# Altium PCB TIDA050024.PcbDoc (part 1 of 3)
Units mil, origin at the board's own origin, x right, y up, seen from the top; angles counter-clockwise.
Board outline 5500.19 x 3301.39 mil, 4 copper layers (Top Layer, Signal Layer 1, Signal Layer 2, Bottom Layer), stack 46.8 mil thick; 150 components, 88 nets, 368 pads, 374 vias.
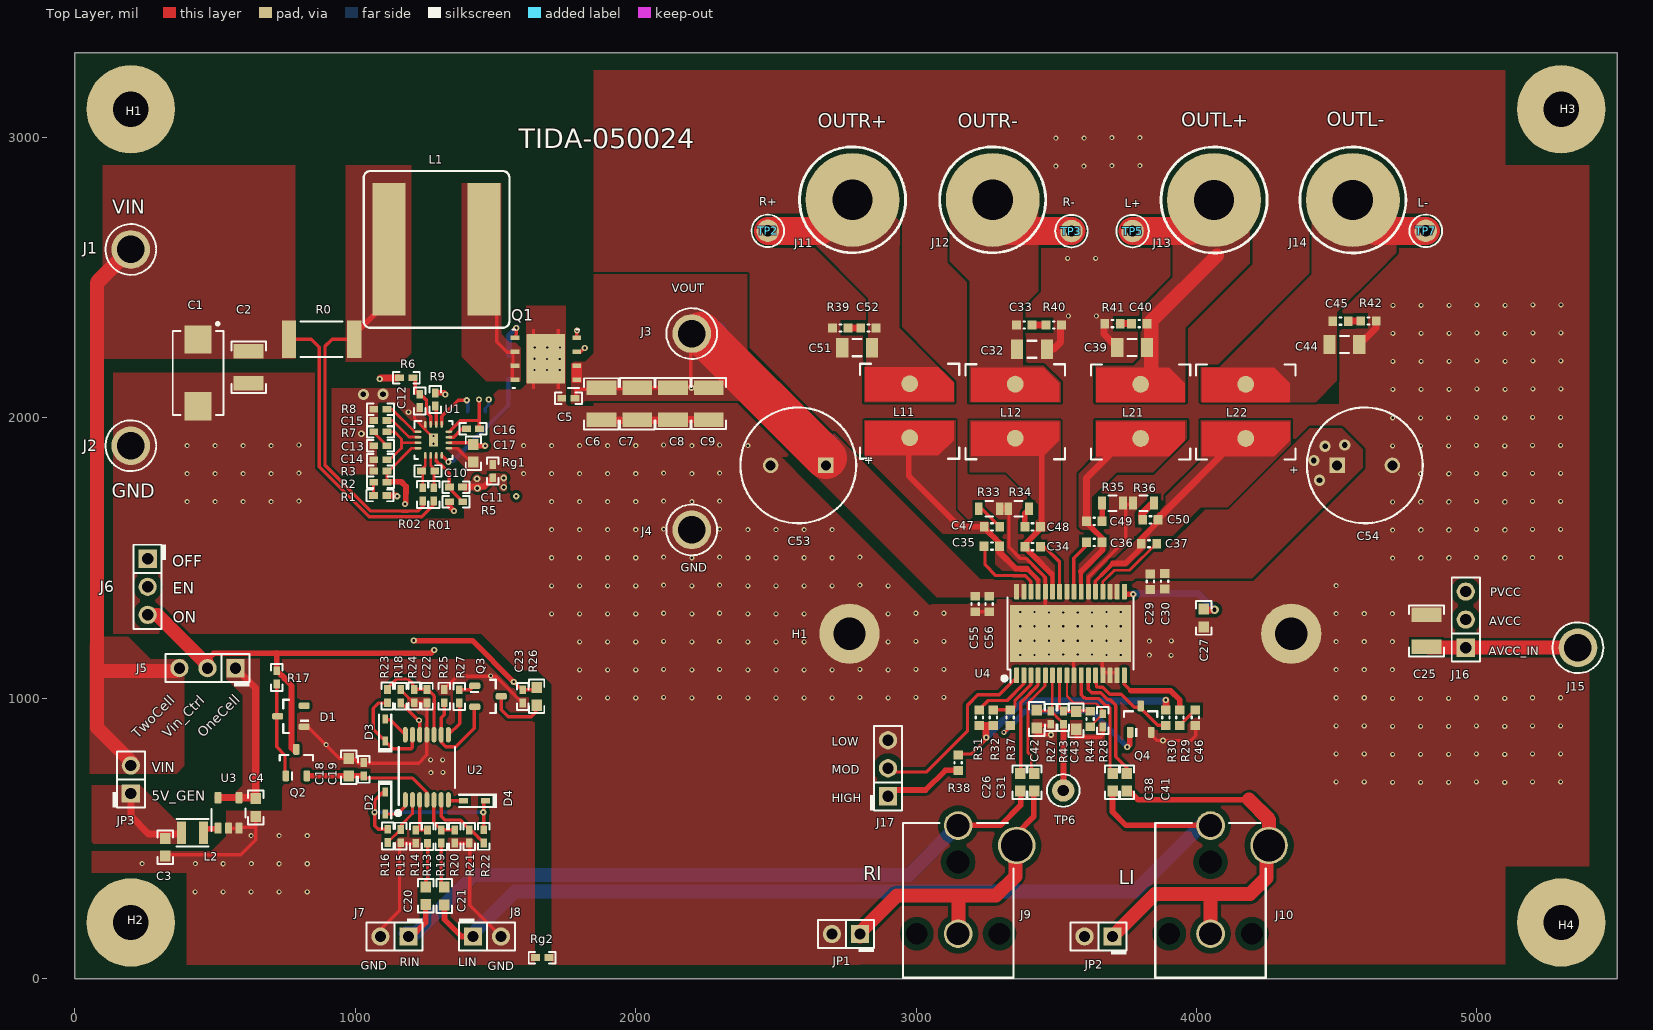
[diagram p0: Top Layer view]
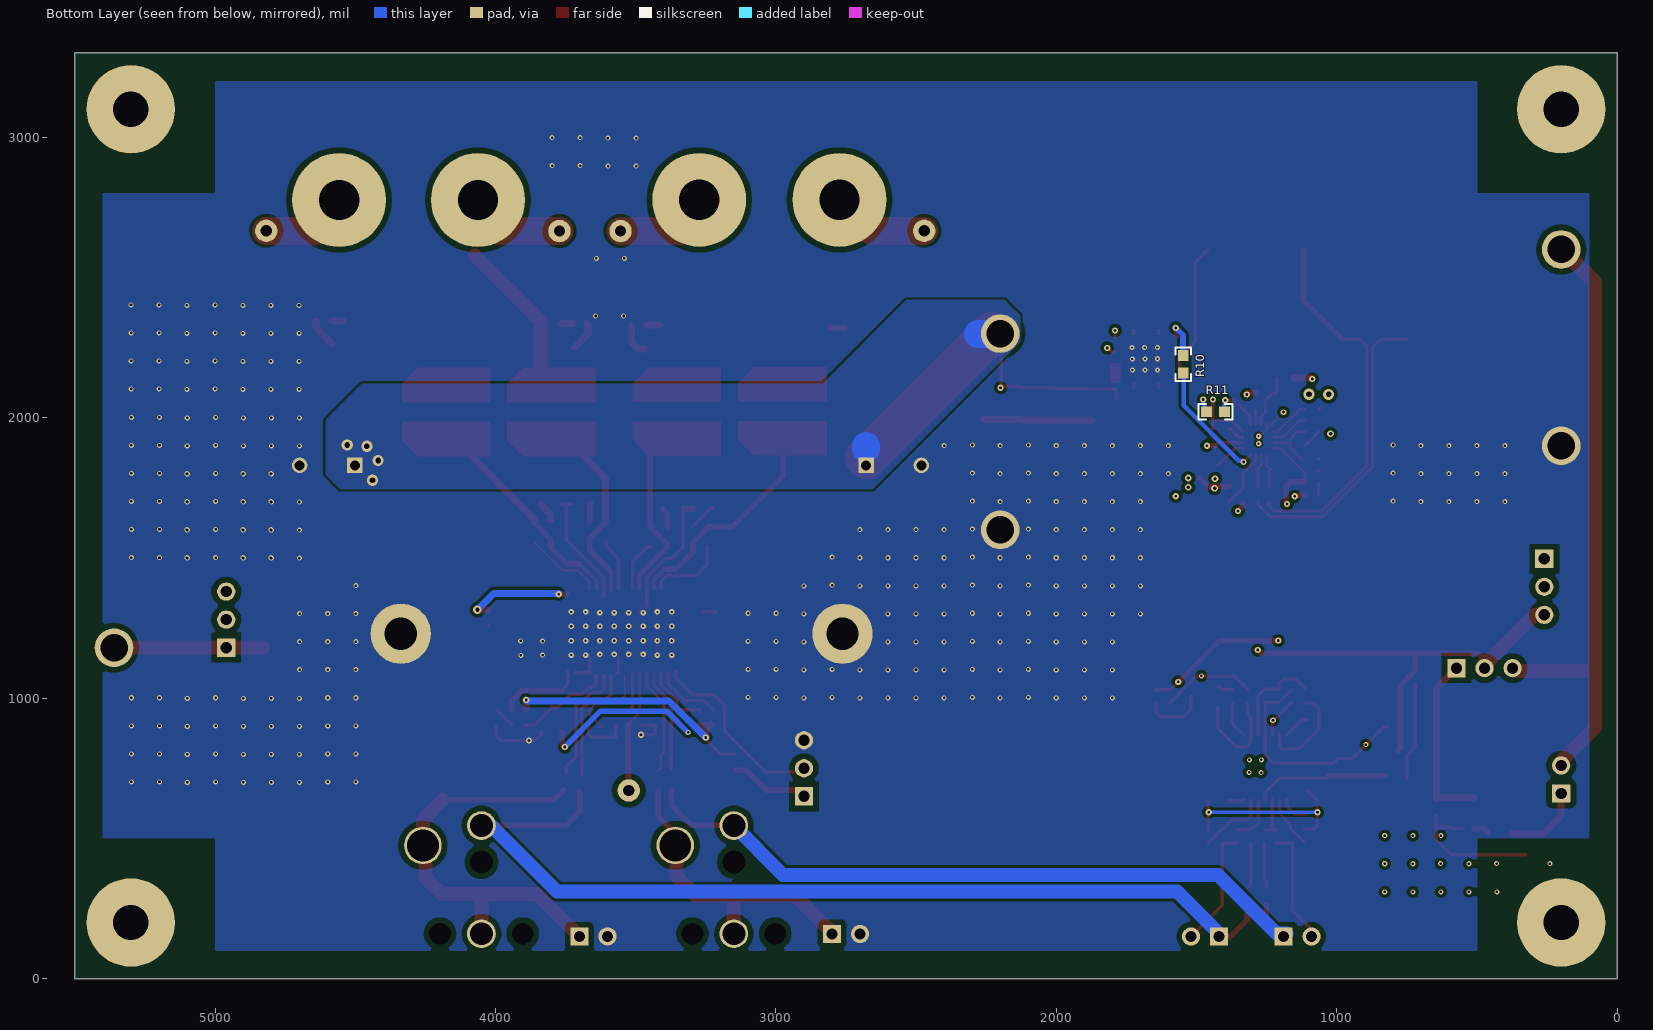
[diagram p1: Bottom Layer view, seen from below]
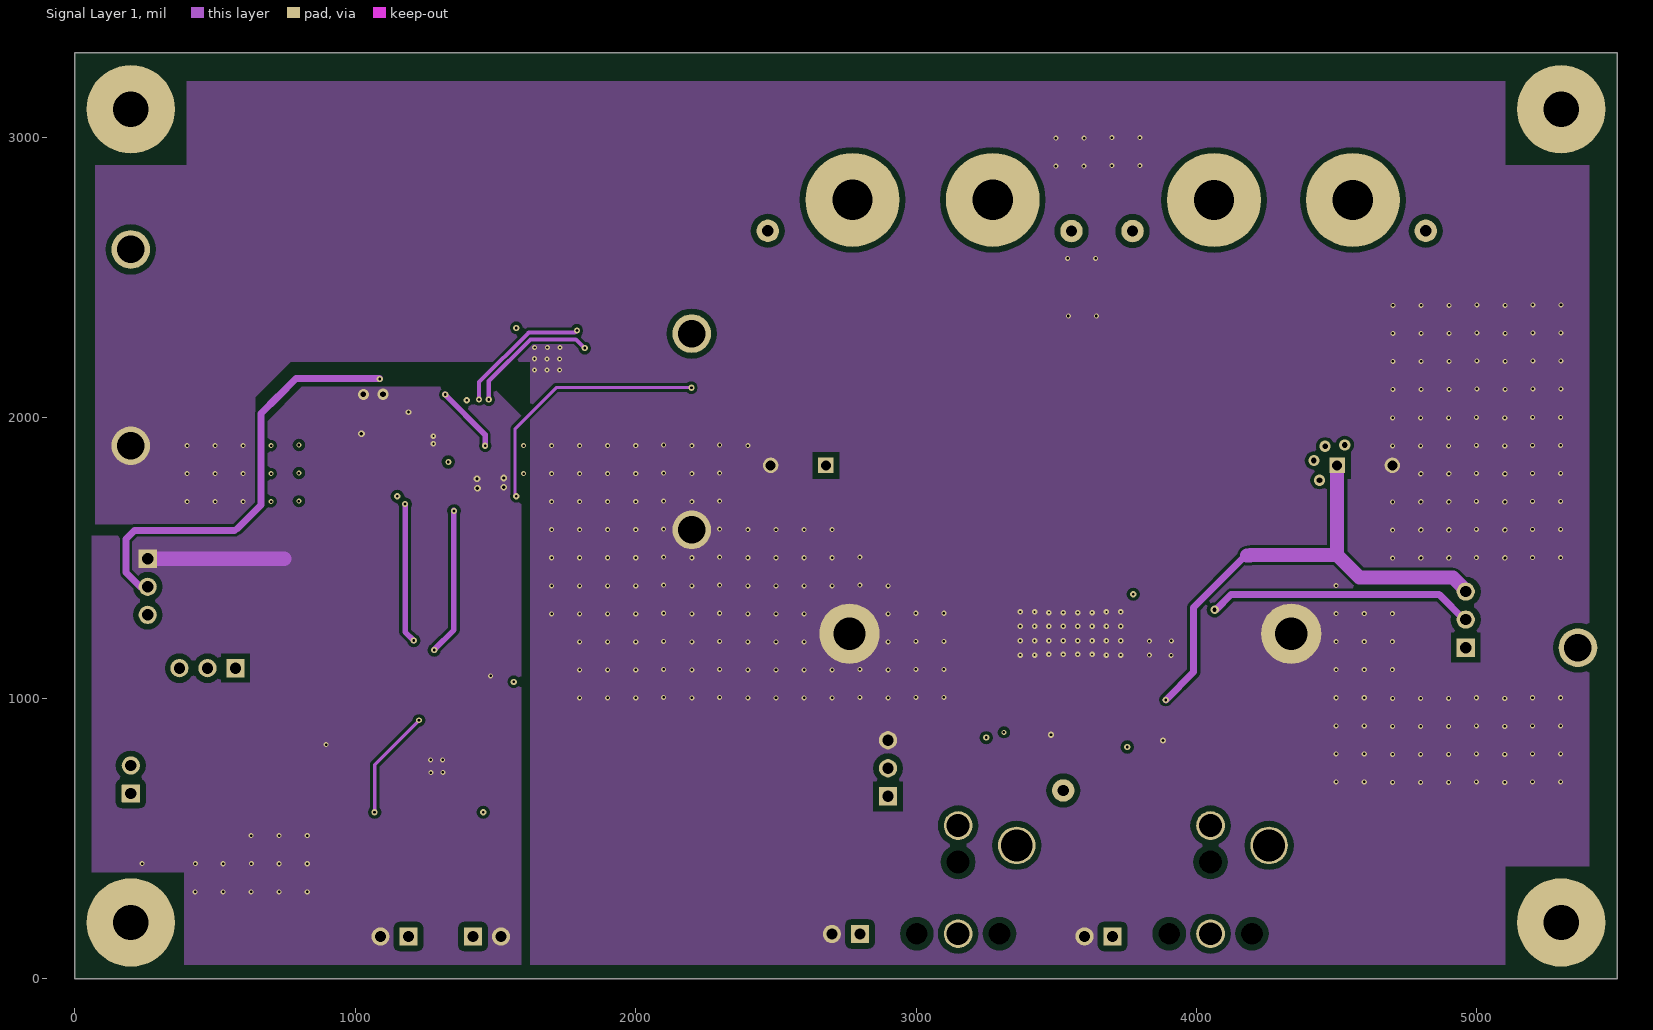
[diagram p2: Signal Layer 1]
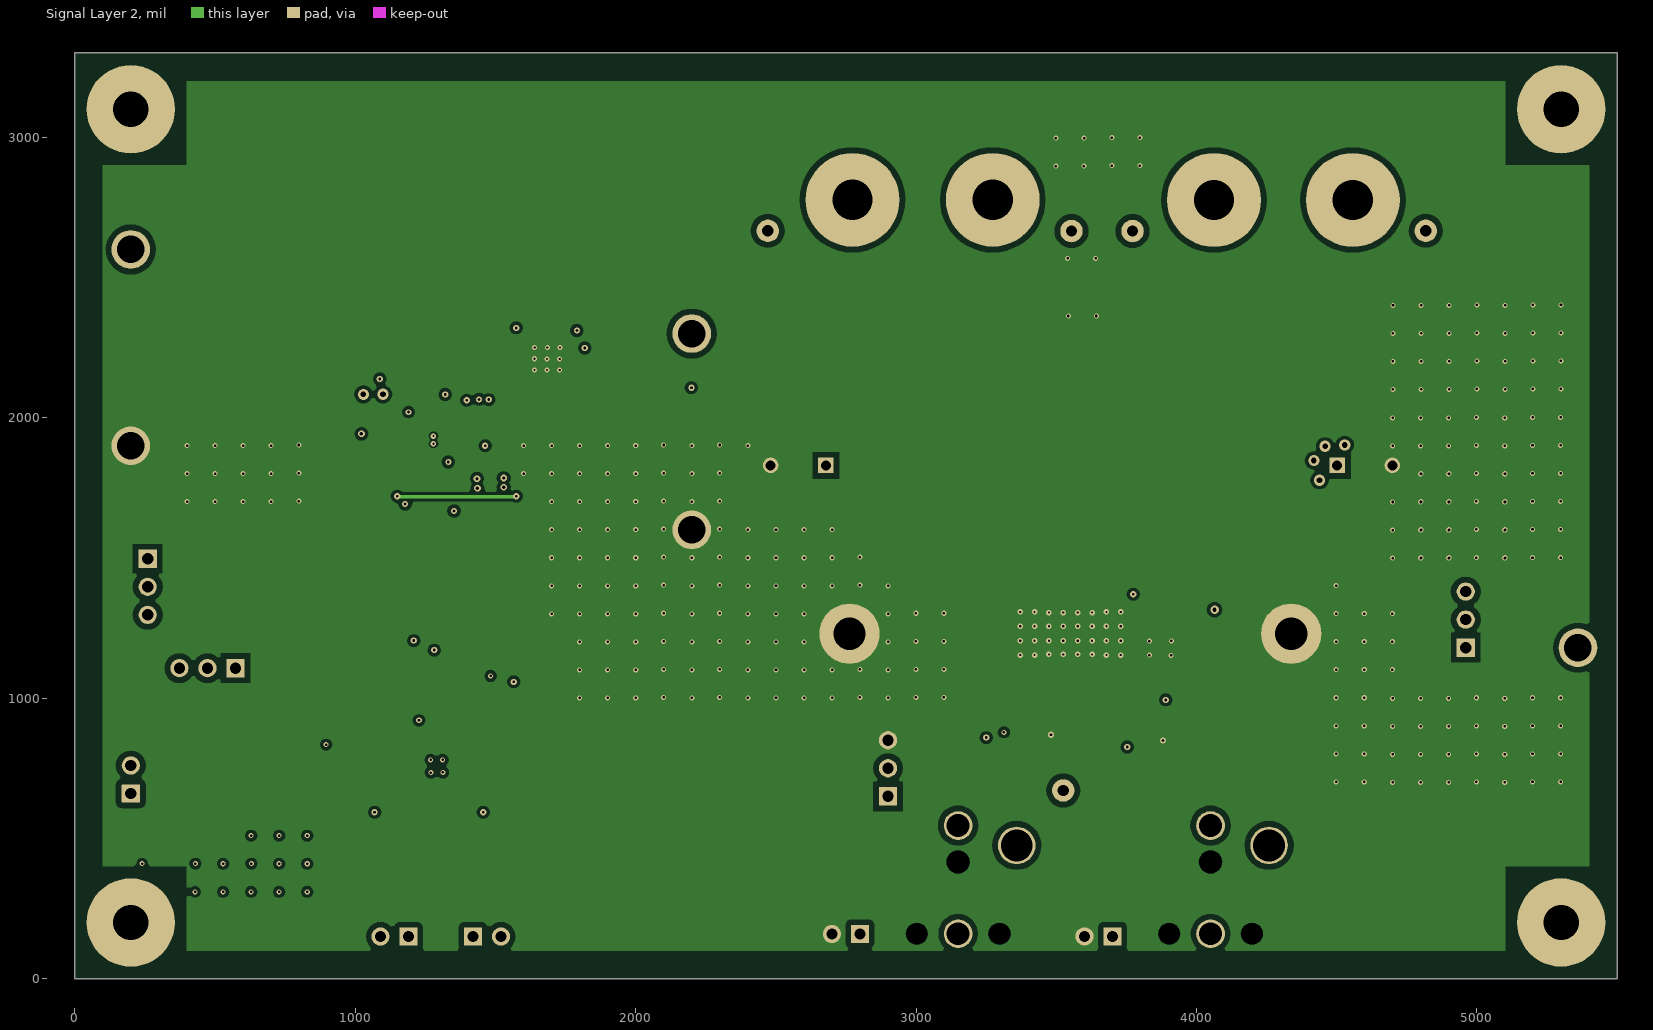
[diagram p3: Signal Layer 2]

## Layer stack, top to bottom
Top Solder: solder mask 0.4, Solder Resist, Dk 3.5
Top Layer: signal copper 2.8
Dielectric1: core 12.8, FR-4, Dk 4.2
Signal Layer 1: signal copper 1.4
Dielectric 3: core 12.8, Dk 4.2
Signal Layer 2: signal copper 1.4
Dielectric 2: core 12.8, Dk 4.2
Bottom Layer: signal copper 2.8
Bottom Solder: solder mask 0.4, Solder Resist, Dk 3.5

## Board outline
0,0 5500,0 5500.19,0.19 5500.19,3301.39 0.57,3301.39

## Design rules (kind name [scope] priority, off if disabled: settings)
AcuteAngle [All] p1: minimum=4.50000000000000E+0001 checktracksonly=FALSE
AssemblyTestPointUsage [All] p1: valid=2
Clearance "U1 Clearance" [InComponent('U1')] p1: gap=6 ignorepadtopadclearanceinfootprint=FALSE except(0: Arc-Hole Track-Hole SMDPad-Hole THPad-Hole Via-Hole Fill-Hole Poly-Hole Region-Hole Text-Hole)
Clearance "U2 Clearance" [InComponent('U2')] p2: gap=7.5 ignorepadtopadclearanceinfootprint=FALSE except(0: Arc-Hole Track-Hole SMDPad-Hole THPad-Hole Via-Hole Fill-Hole Poly-Hole Region-Hole Text-Hole; 7: Arc-Text)
Clearance "U3 Clearance" [InComponent('U3')] p3: gap=7.5 ignorepadtopadclearanceinfootprint=FALSE except(0: Arc-Hole Track-Hole SMDPad-Hole THPad-Hole Via-Hole Fill-Hole Poly-Hole Region-Hole Text-Hole; 7: Arc-Text)
Clearance Clearance_BoardEdge [OnCopper and Not InComponentClass('Logo') and not InComponentClass('FiducialMark') and not InRegion(1000,500,4000,800) vs IsKeepOut] p4: gap=15 ignorepadtopadclearanceinfootprint=FALSE except(0: Arc-Hole Track-Region Track-Hole SMDPad-Hole THPad-Hole Via-Hole Fill-Hole Poly-Hole Region-Hole Text-Hole; 10: Track-Poly Poly-Poly Poly-Region Poly-Text Region-Region Region-Text; 30: Arc-Arc Text-Text)
Clearance [All] p5: gap=8 ignorepadtopadclearanceinfootprint=FALSE except(0: Arc-Hole Track-Hole SMDPad-Hole THPad-Hole Via-Hole Fill-Hole Poly-Hole Region-Hole Text-Hole; 6: Track-Track Track-SMDPad SMDPad-SMDPad SMDPad-THPad; 10: Track-Poly SMDPad-Poly; 12: Via-Poly; 20: THPad-Poly)
ComponentClearance ComponentClearance_MountingHoles_FiducialMarks [InComponentClass('Mounting Holes') vs InComponentClass('FiducialMark')] p1: gap=20 collisioncheckmode=3 verticalgap=10 showdistances=FALSE
ComponentClearance ComponentClearance_SHUNT [InComponentClass('Shunt')] p2: gap=0 collisioncheckmode=3 verticalgap=0 showdistances=FALSE
ComponentClearance ComponentClearance_Logo [All] p3: gap=10 collisioncheckmode=3 verticalgap=10 showdistances=FALSE
ComponentClearance ComponentClearance_ScrewToNut [(HasFootprint('NY PMS 440 0025 PH')) vs (HasFootprint('Keystone_1902C'))] p4: gap=5 collisioncheckmode=3 verticalgap=10 showdistances=FALSE
ComponentClearance ComponentClearance_MountingHoles [InComponentClass('Mounting Holes')] p5: gap=250 collisioncheckmode=3 verticalgap=100000 showdistances=FALSE
ComponentClearance ComponentClearance_SmallPassives [HasFootprint('0201*') or HasFootprint('0402*') or HasFootprint('0508') or HasFootprint('0603*') or HasFootprint('0612') or HasFootprint('0805*') or HasFootprint('0815*') or HasFootprint('0830*') or HasFootprint('1206*') or HasFootprint('1210*') or HasFootprint('1808*') or HasFootprint('1812*') or HasFootprint('1825*') or HasFootprint('2010*') or HasFootprint('2220*') or HasFootprint('2225*') or HasFootprint('2512*') or HasFootprint('2728*') or HasFootprint('3518*') vs HasFootprint('0201*') or HasFootprint('0402*') or HasFootprint('0508') or HasFootprint('0603*') or HasFootprint('0612') or HasFootprint('0805*') or HasFootprint('0815*') or HasFootprint('0830*') or HasFootprint('1206*') or HasFootprint('1210*') or HasFootprint('1808*') or HasFootprint('1812*') or HasFootprint('1825*') or HasFootprint('2010*') or HasFootprint('2220*') or HasFootprint('2225*') or HasFootprint('2512*') or HasFootprint('2728*') or HasFootprint('3518*')] p6: gap=20 collisioncheckmode=3 verticalgap=10 showdistances=FALSE
ComponentClearance ComponentClearance_THtoSMT [IsThruComponent vs IsSMTComponent] p7 off: gap=10 collisioncheckmode=3 verticalgap=100000 showdistances=FALSE
ComponentClearance ComponentClearance_THtoTH [IsThruComponent vs IsThruComponent] p8: gap=10.11 collisioncheckmode=3 verticalgap=100000 showdistances=FALSE
ComponentClearance [All] p9: gap=10 collisioncheckmode=3 verticalgap=10 showdistances=FALSE
DiffPairsRouting [All] p1: maxlimit=100 minlimit=10 mostfreqgap=10 toplayer_minwidth=15 toplayer_maxwidth=15 toplayer_prefwidth=15 midlayer1_minwidth=15 midlayer1_maxwidth=15 midlayer1_prefwidth=15 midlayer2_minwidth=15 midlayer2_maxwidth=15 midlayer2_prefwidth=15 bottomlayer_minwidth=15 bottomlayer_maxwidth=15 bottomlayer_prefwidth=15 maxuncoupledlength=1000
FabricationTestPointUsage TestPointUsage [All] p1: valid=2 allowmultiple=FALSE
FabricationTestpoint Testpoint [All] p1: side=3 testpointundercomponent=TRUE minsize=40 maxsize=100 preferedsize=60 minholesize=0 maxholesize=40 preferedholesize=32 testpointgrid=1 allowsidetop=TRUE allowsidebottom=TRUE usegrid=TRUE gridtolerance=0.01
FanoutControl Fanout_LCC [IsLCC] p1: bgadir=Out bgaviamode=Centered fanoutstyle=Auto fanoutdirection=Alternating viagrid=1 // Fanout_LCC (Default Rule)
FanoutControl Fanout_BGA [IsBGA] p2: bgadir=Out bgaviamode=Centered fanoutstyle=Auto fanoutdirection=Alternating viagrid=1 // Fanout_BGA (Default Rule)
FanoutControl Fanout_Default [All] p4: bgadir=Out bgaviamode=Centered fanoutstyle=Auto fanoutdirection=Alternating viagrid=1 // Fanout_Default (Default Rule)
FanoutControl Fanout_Small [(CompPinCount < 5)] p5: bgadir=Out bgaviamode=Centered fanoutstyle=Auto fanoutdirection=OutThenIn viagrid=1 // Fanout_Small (Default Rule)
HoleSize [All] p1: absolutevalues=TRUE maxlimit=100 minlimit=8 maxpercent=80.000 minpercent=20.000
HoleToHoleClearance [All] p1: gap=1 allowstackedmicrovias=TRUE
MinimumAnnularRing MinimumAnnularRing_small [TouchesRoom('BGA_Room')] p1: minimumring=2.8
MinimumAnnularRing MinimumAnnularRing_ThermalPadVias [IsVia and InAnyComponent] p2: minimumring=5.91
MinimumAnnularRing [All] p3: minimumring=5
MinimumSolderMaskSliver MinimumSolderMaskSliver_Logo [InComponentClass('Logo') vs InComponentClass('Logo')] p1: minsoldermaskwidth=0.7
MinimumSolderMaskSliver [All] p2: minsoldermaskwidth=3
PlaneClearance [All] p1: clearance=10
PlaneConnect [All] p1: planeconnectstyle=Direct reliefexpansion=10 reliefentries=4 reliefconductorwidth=10 reliefairgap=10
PolygonConnect PolygonConnect-TH-Relief [IsPoly vs (IsThruPin)  And Not (InComponent('U3'))  And Not (InComponent('U4'))] p1: connectstyle=Direct reliefconductorwidth=20 reliefentries=4 polygonreliefangle="90 Angle" airgapwidth=10
PolygonConnect PolygonConnect-DirectConn [All] p2: connectstyle=Direct reliefconductorwidth=10 reliefentries=4 polygonreliefangle="90 Angle" airgapwidth=10
PolygonConnect [All] p3: connectstyle=Relief reliefconductorwidth=10 reliefentries=4 polygonreliefangle="90 Angle" airgapwidth=10
RoutingVias ThermalPadVias [IsVia and InAnyComponent] p1: holewidth=7.87 width=19.68 viastyle="Through Hole" minholewidth=7.87 minwidth=19.68 maxholewidth=12.99 maxwidth=23.62
RoutingVias [All] p2: holewidth=10 width=22 viastyle="Through Hole" minholewidth=4 minwidth=10 maxholewidth=100 maxwidth=100
SMDToCorner [All] p1: distance=0
SilkToBoardRegionClearance [Not ((IsComment or IsDesignator) And (Hide <> 'False')) and not InRegion(1000,500,4000,800)] p1:
SilkToSilkClearance SilkToSilkClearance_Pb-FreeLogo [(HasFootprint('Pb-Free_Overlay_Medium') OR HasFootprint('Pb-Free_Overlay_Small')) vs (HasFootprint('Pb-Free_Overlay_Medium') OR HasFootprint('Pb-Free_Overlay_Small'))] p1: silktosilkclearance=0
SilkToSilkClearance [All] p2: silktosilkclearance=3
SilkToSolderMaskClearance SilkToComonentPadClearance [IsPad and InAnycomponent] p1 off: minsilkscreentomaskgap=5 clearancetoexposedcopper=TRUE
SilkToSolderMaskClearance "Silk to Solder Mask Opening" [All] p2 off: minsilkscreentomaskgap=4 clearancetoexposedcopper=TRUE
SolderMaskExpansion [All] p1: expansion=1 istentingtop=FALSE
Width [All] p1: maxlimit=100 minlimit=6 preferedwidth=10 checkconnectedcopper=TRUE
13 further rules are at their usual default settings.

## Classes and differential pairs
component class "Mounting Holes": H1 H2 H3 H4
component class TIDA050024_Hardware: H1 H2 H3 H4
component class TIDA050024_1: C1 C2 C3 C4 C5 C6 C7 C8 C9 C10 C11 C12 C13 C14 C15 C16 C17 C18 C19 C20 C21 C22 C23 D1 D2 D3 D4 J1 J2 J3 J4 J5 J6 J7 J8 JP3 L1 L2 Q1 Q2 Q3 R0 R01 R1 R2 R02 R3 R5 R6 R7 R8 R9 R10 R11 R12 R13 R14 R15 R16 R17 R18 R19 R20 R21 R22 R23 R24 R25 R26 R27 Rg1 Rg2 U1 U2 U3
component class Header: J5 J6 J7 J8 J16 J17 JP1 JP2 JP3
component class "Full Flood": C29 C30 C34 C35 C36 C37 C55 C56 R33 R34 R35 R36
component class "LC Caps": C32 C39 C44 C51
component class TIDA050024_2: C25 C26 C27 C29 C30 C31 C32 C33 C34 C35 C36 C37 C38 C39 C40 C41 C42 C43 C44 C45 C46 C47 C48 C49 C50 C51 C52 C53 C54 C55 C56 H1 J10 J11 J12 J13 J14 J15 J16 J17 JP1 JP2 L11 L12 L21 L22 Q4 R27 R28 R29 R30 R31 R32 R33 R34 R35 R36 R37 R38 R39 R40 R41 R42 R43 R44 TP2 TP3 TP5 TP6 TP7 U4

## Components (designator, comment, footprint, x,y, rotation, side; value= is the part's Value field where it differs from the comment)
C1 "T495D476M025ATE120" 7343-31 440,2160 r270 top value=47uF
C2 "GRM32ER61E226KE15L" 1210_270 620,2180 r270 top value=22uF
C3 "GRM188R61E106MA73D" 0603 322.91,468.45 r270 top value=10uF
C4 "GRM188R61E106MA73D" 0603 645,610 r270 top value=10uF
C5 "C1005X5R1E105K050BC" 0402 1760,2070 r180 top value=1uF
C6 "GRM32ER61E226KE15L" 1210_270 1877.87,2049.47 r270 top value=22uF
C7 "GRM32ER61E226KE15L" 1210_270 2005.85,2049.96 r270 top value=22uF
C8 "GRM32ER61E226KE15L" 1210_270 2133.02,2050.19 r270 top value=22uF
C9 "GRM32ER61E226KE15L" 1210_270 2260.76,2050.18 r270 top value=22uF
C10 "GRM1555C1H101JA01D" 0402 1260,1810 r0 top value=100pF
C11 "CGA2B3X7R1H104K050BB" 0402 1359.34,1752.85 r0 top value=0.1uF
C12 "CGA2B3X7R1H104K050BB" 0402 1230,2060 r270 top value=0.1uF
C13 "GCM155R71E223KA55D" 0402 1090,1900 r180 top value=0.022uF
C14 "GRM1555C1H101JA01D" 0402 1090,1850 r180 top value=100pF
C15 "CGA2B3X7R1H104K050BB" 0402 1090,1990 r180 top value=0.1uF
C16 "CGA2B3X7R1H104K050BB" 0402 1420,1960 r180 top value=0.1uF
C17 "GRM188R61E106MA73D" 0603 1421.37,1873.58 r270 top value=10uF
C18 "GRM188R61E106MA73D" 0603 976.99,754.04 r90 top value=10uF
C19 "CGA2B3X7R1H104K050BB" 0402 1031,746.41 r90 top value=0.1uF
C20 "GRM188R61E106MA73D" 0603 1251.93,295.02 r90 top value=10uF
C21 "GRM188R61E106MA73D" 0603 1317.29,294.67 r90 top value=10uF
C22 "C1005X5R1E105K050BC" 0402 1256.12,1006.77 r270 top value=1uF
C23 "GRM1555C1H101JA01D" 0402 1596.87,1006.26 r270 top value=100pF
C25 "GRM32ER61E226KE15L" 1210_270 4820,1240 r90 top value=22uF
C26 "GRM188R61E105KA12D" 0603 3370.57,700.57 r90 top value=1uF
C27 "GRM188R61E105KA12D" 0603 4025.43,1286.03 r270 top value=1uF
C29 "GCM188R71H104KA57D" 0603L 3835.57,1415.57 r90 top value=0.1uF
C30 "GRM1885C1H102JA01D" 0603L 3886.18,1416.92 r90 top value=1000pF
C31 "GRM188R61E105KA12D" 0603 3420.57,700.57 r90 top value=1uF
C32 "GRM31MR71H684KA88L" 1206L 3413.43,2244.29 r0 top value=0.68uF
C33 "GRM188R71H103KA01D" 0603L 3385.57,2330.57 r0 top value=0.01uF
C34 "GCM188R71H104KA57D" 0603L 3415.57,1540.57 r0 top value=0.1uF
C35 "GCM188R71H104KA57D" 0603L 3270.23,1542.04 r180 top value=0.1uF
C36 "GCM188R71H104KA57D" 0603L 3635.57,1555.57 r180 top value=0.1uF
C37 "GCM188R71H104KA57D" 0603L 3830.57,1550.57 r0 top value=0.1uF
C38 "GRM188R61E105KA12D" 0603 3700.57,700.57 r90 top value=1uF
C39 "GRM31MR71H684KA88L" 1206L 3770.57,2250.57 r180 top value=0.68uF
C40 "GRM188R71H103KA01D" 0603L 3795.57,2335.57 r180 top value=0.01uF
C41 "GRM188R61E105KA12D" 0603 3750.57,700.57 r90 top value=1uF
C42 "GRM188R61E105KA12D" 0603 3430.57,925.57 r90 top value=1uF
C43 "GRM188R61E105KA12D" 0603 3570.57,920.57 r90 top value=1uF
C44 "GRM31MR71H684KA88L" 1206L 4527.15,2260.95 r0 top value=0.68uF
C45 "GRM188R71H103KA01D" 0603L 4513.48,2344.34 r0 top value=0.01uF
C46 "GRM1885C1H470JA01D" 0603L 3995.57,930.57 r270 top value=47pF
C47 "GRM1885C1H331JA01D" 0603L 3270.57,1610.57 r180 top value=330pF
C48 "GRM1885C1H331JA01D" 0603L 3415.57,1610.57 r0 top value=330pF
C49 "GRM1885C1H331JA01D" 0603L 3635.57,1630.57 r180 top value=330pF
C50 "GRM1885C1H331JA01D" 0603L 3835.57,1635.57 r0 top value=330pF
C51 "GRM31MR71H684KA88L" 1206L 2790,2250 r180 top value=0.68uF
C52 "GRM188R71H103KA01D" 0603L 2830,2320 r180 top value=0.01uF
C53 "EEU-FC1V221" FC_1000x1250 2580,1830 r180 top value=220uF
C54 "EEU-FC1V221" FC_1000x1250 4600,1830 r0 top value=220uF
C55 "GCM188R71H104KA57D" 0603L 3210.57,1335.57 r90 top value=0.1uF
C56 "GRM1885C1H102JA01D" 0603L 3260.57,1335.57 r90 top value=1000pF
D1 "BZX84C4V3LT1G" SOT-23 770.87,935.34 r180 top value=4.3V
D2 "1N4148WT" Fairchild_SOD-523F 1106.87,626.26 r270 top value=75V
D3 "1N4148WT" Fairchild_SOD-523F 1106.87,886.26 r90 top value=75V
D4 "1N4148WT" Fairchild_SOD-523F 1425.49,633.82 r180 top value=75V
H1 "NY PMS 440 0025 PH" "NY PMS 440 0025 PH" 200,3100 r90 top
H1 "ATS-TI10P-521-C1-R1" HSINK_ATS-TI10P-521-C1-R1 3550,1230 r180 top
H2 "NY PMS 440 0025 PH" "NY PMS 440 0025 PH" 200,200 r90 top
H3 "NY PMS 440 0025 PH" "NY PMS 440 0025 PH" 5300,3100 r90 top
H4 "NY PMS 440 0025 PH" "NY PMS 440 0025 PH" 5300,200 r90 top
J1 "1502-2" Keystone1502-2 200,2600 r0 top
J2 "1502-2" Keystone1502-2 200,1900 r0 top
J3 "1502-2" Keystone1502-2 2200,2300 r0 top
J4 "1502-2" Keystone1502-2 2200,1600 r0 top
J5 "TSW-103-07-G-S" TSW-103-07-G-S 473.18,1106.94 r180 top
J6 "TSW-103-07-G-S" TSW-103-07-G-S 260.09,1397.08 r270 top
J7 "TSW-102-07-G-S" TSW-102-07-G-S 1140,150 r180 top
J8 "TSW-102-07-G-S" TSW-102-07-G-S 1470,150 r0 top
J9 "RIN" Keystone_971 3150,160 r90 top
J10 "LIN" Keystone_970 4050,160 r90 top
J11 "ROUT+" Keystone_7006 2773.39,2776.89 r0 top
J12 "ROUT-" Keystone_7007 3273.39,2776.89 r0 top
J13 "LOUT+" Keystone_7006 4062.44,2776.3 r0 top
J14 "LOUT-" Keystone_7007 4557.44,2776.3 r0 top
J15 "Suggest using a net name here" Keystone1502-2 5360,1180 r0 top value=Double
J16 "AVCC-SEL" PBC03SAAN 4960,1280 r90 top
J17 "TSW-103-07-G-S" TSW-103-07-G-S 2900,750 r90 top
JP1 "TSW-102-07-G-S" TSW-102-07-G-S 2749.79,159.14 r180 top
JP2 "TSW-102-07-G-S" TSW-102-07-G-S 3650.57,150.57 r180 top
JP3 "TSW-102-07-G-S" TSW-102-07-G-S 200,710 r90 top
L1 "XAL1350-302MEB" XAL1350 1290,2600 r0 top value=3uH
L2 "DFE252012F-2R2M=P2" DFE252012C 420,520 r0 top value=2.2uH
L11 "SRT8045-103MEB" SRT8045 2977.09,2022.82 r90 top value=10uH
L12 "SRT8045-103MEB" SRT8045 3353.47,2021.36 r90 top value=10uH
L21 "SRT8045-103MEB" SRT8045 3800.57,2020.57 r90 top value=10uH
L22 "SRT8045-103MEB" SRT8045 4175.57,2020.57 r90 top value=10uH
Q1 "CSD87351Q5D" DQY0008A 1680,2210 r180 top value=30V
Q2 "BC850CLT1G" SOT-23 790,770 r90 top value="45 V"
Q3 "BSS138" SOT-23 1473.54,1006.62 r0 top value=50V
Q4 "BC850CLT1G" SOT-23 3800.57,925.57 r90 top value="45 V"
R0 "CSNL2512FT2L00" 2512 880,2280 r0 top value=0.002
R01 "CRCW040210R0FKED" 0402 1280.56,1726.59 r270 top value=10.0
R1 "CRCW040249R9FKED" 0402 1089.01,1722.61 r0 top value=49.9
R02 "CRCW040210R0FKED" 0402 1240.56,1726.59 r270 top value=10.0
R2 "ERJ-2RKF2003X" 0402 1090,1770 r180 top value=200k
R3 "CRCW040256K2FKED" 0402 1090,1810 r0 top value=56.2k
R5 "CRCW040210R0FKED" 0402 1360,1700 r180 top value=10.0
R6 "CRCW040210R0FKED" 0402 1182.18,2142.81 r180 top value=10.0
R7 "CRCW04027K50FKED" 0402 1090,1950 r0 top value=7.50k
R8 "CRCW0402137KFKED" 0402 1090,2030 r0 top value=137k
R9 "CRCW0402100KFKED" 0402 1285,2065 r270 top value=100k
R10 "RCS06030000Z0EA" 0603 1547.78,2190.77 r90 bottom value=0
R11 "RCS06030000Z0EA" 0603 1432.37,2021.02 r0 bottom value=0
R13 "CRCW04020000Z0ED" 0402 1257.9,506.32 r270 top value=0
R14 "CRCW0402100KDHEDP" 0402 1215.81,506.32 r90 top value=100k
R15 "CRCW040210K2FKED" 0402 1162.1,507.78 r90 top value=10.2k
R16 "CRCW040210K2FKED" 0402 1115.71,508.72 r90 top value=10.2k
R17 "CRCW04023K01FKED" 0402 720.03,1074.02 r90 top value=3.01k
R18 "CRCW0402100KDHEDP" 0402 1162.44,1006.77 r270 top value=100k
R19 "CRCW04020000Z0ED" 0402 1306.42,506.7 r270 top value=0
R20 "CRCW0402100KDHEDP" 0402 1355.33,506.82 r90 top value=100k
R21 "CRCW040210K2FKED" 0402 1407.1,506.82 r90 top value=10.2k
R22 "CRCW040210K2FKED" 0402 1459.04,507.43 r90 top value=10.2k
R23 "CRCW040212R1FKED" 0402 1115.13,1007.4 r90 top value=12.1
R24 "ERJ-2RKF1004X" 0402 1210.39,1007.09 r90 top value=1.00Meg
R25 "CRCW040218K7FKED" 0402 1317.3,1006.97 r270 top value=18.7k
R26 "CRCW060310K5FKEA" 0603 1646.87,1006.26 r90 top value=10.5k
R27 "CRCW04020000Z0ED" 0402 1371.04,1006.51 r270 top value=0
R27 "CRCW040220K5FKED" 0402 3480.57,930.57 r90 top value=20.5k
R28 "CRCW040239K0JNED" 0402 3665.57,920.57 r90 top value=39k
R29 "RG1608P-472-B-T5" 0603L 3940.57,930.57 r90 top value=4.70k
R30 "RC0603FR-07100KL" 0603L 3890.57,930.57 r270 top value=100k
R31 "RC0603FR-07499KL" 0603L 3225.57,930.57 r270 top value=499k
R32 "RC0603FR-07100KL" 0603L 3275.57,930.57 r90 top value=100k
R33 "CRCW080510R0JNEA" 0805_KTR 3260.57,1675.57 r180 top value=10
R34 "CRCW080510R0JNEA" 0805_KTR 3365.57,1675.57 r0 top value=10
R35 "CRCW080510R0JNEA" 0805_KTR 3700.57,1695.57 r180 top value=10
R36 "CRCW080510R0JNEA" 0805_KTR 3810.57,1695.57 r0 top value=10
R37 "RC0603FR-07100KL" 0603L 3335.57,930.57 r270 top value=100k
R38 "RC0603FR-07100KL" 0603L 3150,770 r90 top value=100k
R39 "CRCW06033R30JNEA" 0603L 2730,2320 r0 top value=3.3
R40 "CRCW06033R30JNEA" 0603L 3490.57,2330.57 r180 top value=3.3
R41 "CRCW06033R30JNEA" 0603L 3700.57,2335.57 r0 top value=3.3
R42 "CRCW06033R30JNEA" 0603L 4613.14,2344.93 r180 top value=3.3
R43 "ERJ-2GE0R00X" 0402 3525.57,930.57 r90 top value=0
R44 "RC0603FR-07100KL" 0603L 3620.57,925.57 r270 top value=100k
Rg1 "CRCW04020000Z0ED" 0402 1490.91,1809.42 r90 top value=0
Rg2 "CRCW04020000Z0ED" 0402 1666.88,75.17 r0 top value=0
TP2 "R+" Keystone5003 2471.45,2666.3 r0 top value=Orange
TP3 "R-" Keystone5003 3554.07,2665.65 r0 top value=Orange
TP5 "L+" Keystone5003 3771.82,2665.65 r0 top value=Orange
TP6 "PLIMIT" Keystone5003 3524.6,670.85 r0 top value=Orange
TP7 "L-" Keystone5003 4817.44,2666.3 r0 top value=Orange
U1 "TPS43061RTER" RTE0016E 1279.16,1920.84 r0 top
U2 "OPA4377AIPW" PW0014A_N 1255.49,753.47 r90 top
U3 "TPS613222ADBVR" DBV0005A_N 548.26,590.78 r90 top
U4 "TPA3128D2DAPR" DAP0032A_N 3550.57,1230.57 r90 top

## Footprints (in the part's own frame and the unit in brackets; to place one, negate y for a bottom-side part, rotate by r counter-clockwise, add the part's x,y. Pads: shape width x height; smd on the part's side, far side on the other; paste and mask are expansions set on the pad)
0402 [mm] "0402 from SM-752 data"
  rect 0.8x0.6 smd: 1(-0.6,0) 2(0.6,0)
  silkscreen extent -1.22,-0.52 1.22,0.52, body extent -0.55,-0.3 0.55,0.3, height 0.6
0603 [mm] "0603 from SM-752 data"
  rect 1x0.95 smd: 1(-0.8,0) 2(0.8,0)
  silkscreen extent -1.52,-0.69 1.52,0.69, body extent -0.87,-0.47 0.87,0.47, height 1
0603L [mm] "0603 from SM-752 data"
  rect 0.8x0.85 smd: 1(-0.7,0) 2(0.7,0)
  silkscreen extent -0.07,-0.33 0.07,0.33, body extent -0.87,-0.47 0.87,0.47, height 1
0805_KTR [mm] "ROHM"
  rect 0.7x1.15 smd: 1(-0.95,0) 2(0.95,0)
  silkscreen extent -0.35,-0.7 0.35,0.7, body extent -1.05,-0.67 1.05,0.67, height 0.65
1206L [mm] "1206 from SM-752 data"
  rect 1.1x1.75 smd: 1(-1.35,0) 2(1.35,0)
  silkscreen extent -0.4,-0.77 0.4,0.77, body extent -1.7,-0.9 1.7,0.9, height 1.35
1210_270 [mm] "1210"
  rect 1.3x2.7 smd: 1(-1.45,0) 2(1.45,0)
  silkscreen extent -2.32,-1.57 2.32,1.57, body extent -1.7,-1.35 1.7,1.35, height 2.7
2512 [mm] "Chip Resistor, Body 6.3x3.2mm, IPC Medium Density"
  rect 1.3x3.4 smd: 1(-2.95,0) 2(2.95,0)
  silkscreen extent -1.9,-1.6 1.9,1.6, body extent -3.22,-1.67 3.22,1.67, height 0.71
7343-31 [mm] "Medium Density based on Kemet T495 dimensions"
  rect 2.55x2.45 smd: 1(-3.025,0) 2(3.025,0)
  silkscreen extent -4.56,-2.3 3.8,2.3, body extent -3.8,-2.3 3.8,2.3, height 3.1
DAP0032A_N [mm]
  rrect22% 1.4x0.45 smd: 1(-3.8,4.875) 2(-3.8,4.225) 3(-3.8,3.575) 4(-3.8,2.925) 5(-3.8,2.275) 6(-3.8,1.625) 7(-3.8,0.975) 8(-3.8,0.325) 9(-3.8,-0.325) 10(-3.8,-0.975) 11(-3.8,-1.625) 12(-3.8,-2.275) 13(-3.8,-2.925) 14(-3.8,-3.575) 15(-3.8,-4.225) 16(-3.8,-4.875) 17(3.8,-4.875) 18(3.8,-4.225) 19(3.8,-3.575) 20(3.8,-2.925) 21(3.8,-2.275) 22(3.8,-1.625) 23(3.8,-0.975) 24(3.8,-0.325) 25(3.8,0.325) 26(3.8,0.975) 27(3.8,1.625) 28(3.8,2.275) 29(3.8,2.925) 30(3.8,3.575) 31(3.8,4.225) 32(3.8,4.875)
  rrect2% 5.2x11 smd paste-2.6 mask-2.6: 33(0,0)
  rrect2% 4.11x4.36 on Top Paste: 33(0,0)
  rrect2% 4.11x4.36 on Top Solder: 33(0,0)
  silkscreen extent -4.44,-5.7 3.25,5.7, body extent -4.06,-5.5 4.06,5.5, height 1.2
DBV0005A_N [mm] "SOT23, 5-Leads, Body 2.9x1.6mm, Pitch 0.95mm, Lead Span 2.8mm, IPC Medium Density"
  rrect17% 1x0.6 smd: 1(-1.375,0.95) 2(-1.375,0) 3(-1.375,-0.95) 4(1.375,-0.95) 5(1.375,0.95)
  silkscreen extent -1.63,-1.55 0.38,1.55, body extent -1.42,-1.46 1.42,1.46, height 1.09
DFE252012C [mm] "Toko"
  rect 0.8x2 smd: 1(-1,0) 2(1,0)
  silkscreen extent -1.45,-1.25 1.45,1.25, body extent -1.35,-1.1 1.35,1.1, height 1.2
DQY0008A [mm]
  rrect24% 0.81x0.41 smd mask+0: 1(-2.795,1.905) 2(-2.795,0.635)
  rrect24% 0.81x0.41 smd: 3(-2.795,-0.635) 4(-2.795,-1.905) 5(2.795,-1.905) 6(2.795,-0.635) 8(2.795,1.905)
  rrect24% 0.81x0.41 smd mask+0.102: 7(2.795,0.635)
  rrect3% 3.48x4.46 smd paste-2.217: 9(0,0)
  Top Layer region: -1.25,-2.175 -1,-2.175 -1,-2.7 -1.25,-2.7
  Top Layer region: 1.25,-2.175 1,-2.175 1,-2.7 1.25,-2.7
  Top Layer region: 1.25,2.175 1,2.175 1,2.7 1.25,2.7
  Top Layer region: -1.25,2.175 -1,2.175 -1,2.7 -1.25,2.7
  Top Layer region: -3.25,0.48 -3.25,2.06 -3.237,2.11 -3.2,2.147 -3.15,2.16 -3.15,2.16 -2.44,2.16 -2.402,2.152 -2.369,2.131 -2.348,2.098 -2.34,2.06 -2.34,2.06 -2.34,0.48 -2.348,0.442 -2.369,0.409 -2.402,0.388 -2.44,0.38 -2.44,0.38 -3.15,0.38 -3.188,0.388 -3.221,0.409 -3.242,0.442 -3.25,0.48
  silkscreen extent -3,-2.65 3,2.65, body extent -3.1,-2.6 3.1,2.6, height 1.51
Fairchild_SOD-523F [mm] "SMD, 2-Leads, Body 1.2x0.8mm"
  rect 0.8x0.5 smd: 1(-1,0) 2(1,0)
  silkscreen extent -2.03,-0.65 1.4,0.65, body extent -0.65,-0.45 0.65,0.45, height 0.7
FC_1000x1250 [mm] "TH, 2-Leads, Body 10x12.5mm, Pin Spacing 5mm"
  rect 1.4x1.4 hole 0.9: 1(-2.5,0)
  round 1.4 hole 0.9: 2(2.5,0)
  silkscreen extent -5.25,-5.25 5.25,5.25, body extent -5.25,-5.25 5.25,5.25, height 13.5
HSINK_ATS-TI10P-521-C1-R1 [mil] "HEAT SINK FOR TI MOD,Body 50x13.9mm"
  round 215 hole 115: 1(-787.4,0) 2(787.4,0)
  body extent -984,-281 984,281, height 984
Keystone1502-2 [mm] "Double Turret"
  round 3.5 hole 2.5: 1(0,0)
  silkscreen extent -2.3,-2.3 2.3,2.3, body extent -1.6,-1.6 1.59,1.6, height 5.62
Keystone5003 [mil] "For Keystone 500x miniature loop terminals"
  round 80 hole 40: 1(0,0)
  silkscreen extent -58,-58 58,58, body extent -49,-49 49,49, height 182
Keystone_970 [mm] "PC Mount Phono Jack-White, TH"
  round 2.6 hole 2.08: 1(0,0) 3(9.8,0)
  round 3.4 hole 2.87: 4(8,-5.3)
  round 0 hole 1.98 unplated: M1(0,3.745) M2(0,-3.745)
  round 0 hole 2.08 unplated: M3(6.5,0)
  silkscreen extent -3.99,-5.01 10.03,5.01, body extent -13.33,-5.43 10.03,5.01, height 13.02
Keystone_971 [mm] "PC Mount Phono Jack-Red, TH"
  round 2.6 hole 2.08: 1(0,0) 3(9.8,0)
  round 3.4 hole 2.87: 4(8,-5.3)
  round 0 hole 1.98 unplated: M1(0,3.745) M2(0,-3.745)
  round 0 hole 2.08 unplated: M3(6.5,0)
  silkscreen extent -3.99,-5.01 10.03,5.01, body extent -13.31,-5.44 10.05,5, height 13.02
Keystone_7006 [mm] "KEYSTONE"
  round 8.5 hole 3.658: 1(0,0)
  silkscreen extent -4.8,-4.8 4.8,4.8, body extent -5.68,-5.69 5.7,5.69, height 26.47
Keystone_7007 [mm] "KEYSTONE"
  round 8.5 hole 3.658: 1(0,0)
  silkscreen extent -4.8,-4.8 4.8,4.8, body extent -5.71,-5.66 5.67,5.72, height 26.48
"NY PMS 440 0025 PH" [mm] "4-40 nylon screw and mounting hole"
  round 8 hole 3.2: 1(0,0)
  body extent -3.3,-3.3 3.3,3.3, height 2.69
PBC03SAAN [mm] "Sullins 100mil, 1x3, 230 mil above insulator"
  rect 1.65x1.65 hole 1.016: 1(-2.54,0)
  round 1.65 hole 1.016: 2(0,0) 3(2.54,0)
  silkscreen extent -3.81,-1.27 3.81,1.27, body extent -3.81,-1.27 3.81,1.27, height 8.38
PW0014A_N [mm] "TSOP, 14-Leads, Body 5x4.4mm, Pitch 0.65mm, IPC Medium Density"
  oval 1.4x0.45 smd: 1(-2.95,1.95) 2(-2.95,1.3) 3(-2.95,0.65) 4(-2.95,0) 5(-2.95,-0.65) 6(-2.95,-1.3) 7(-2.95,-1.95) 8(2.95,-1.95) 9(2.95,-1.3) 10(2.95,-0.65) 11(2.95,0) 12(2.95,0.65) 13(2.95,1.3) 14(2.95,1.95)
  silkscreen extent -3.4,-2.55 1.85,2.55, body extent -3.21,-2.5 3.21,2.5, height 1
RTE0016E [mm] "Texas Insturments"
  oval 0.6x0.24 smd paste+0: 1(-1.4,0.75) 2(-1.4,0.25) 3(-1.4,-0.25) 4(-1.4,-0.75) 9(1.4,-0.75) 10(1.4,-0.25) 11(1.4,0.25) 12(1.4,0.75)
  oval 0.24x0.6 smd paste+0: 5(-0.75,-1.4) 6(-0.25,-1.4) 7(0.25,-1.4) 8(0.75,-1.4) 13(0.75,1.4) 14(0.25,1.4) 15(-0.25,1.4) 16(-0.75,1.4)
  rect 0.8x1.2 smd paste-1: 17(0,0)
  silkscreen extent -1.73,-1.73 1.73,1.73, body extent -1.58,-1.58 1.58,1.58, height 0.81
SOT-23 [mm] "SOT23, 3-Leads, Body 2.9x1.3mm, Pitch 0.95mm, Lead Span 2.5mm, IPC Medium Density"
  rrect50% 1x0.6 smd: 1(-1.2,0.95) 2(-1.2,-0.95) 3(1.2,0)
  silkscreen extent -1.62,-1.5 0.7,1.5, body extent -1.16,-1.45 1.21,1.45, height 1
SRT8045 [mil] "SMD, 2-Leads, Body 8x8.4mm"
  round 60 smd: 1(-94.49,0) 2(98.43,0)
  Top Layer region: 157.48,-102.36 102.36,-157.48 35.43,-157.48 35.43,157.48 157.48,157.48
  Top Layer region: -157.48,-102.36 -102.36,-157.48 -35.43,-157.48 -35.43,157.48 -157.48,157.48
  silkscreen extent -169,-177 169,177, body extent -163,-171 163,171, height 181
TSW-102-07-G-S [mm] "Samtec 100mil, 1x2, 230 mil above insulator"
  rrect6% 1.65x1.65 hole 1.016: 1(-1.27,0)
  round 1.65 hole 1.016: 2(1.27,0)
  silkscreen extent -2.54,-1.65 2.54,1.27, body extent -2.54,-1.27 2.54,1.27, height 8.38
TSW-103-07-G-S [mm] "Samtec 100mil, 1x3, 230 mil above insulator"
  rect 1.65x1.65 hole 1.016: 1(-2.54,0)
  round 1.65 hole 1.016: 2(0,0) 3(2.54,0)
  silkscreen extent -3.81,-1.27 3.81,1.65, body extent -3.81,-1.27 3.81,1.27, height 8.38
XAL1350 [mm] "COILCRAFT"
  rect 2.98x12 smd: 1(-4.3,0) 2(4.3,0)
  silkscreen extent -6.6,-7.1 6.6,7.1, body extent -6.6,-7.1 6.6,7.1, height 5.01

## Part data
C1: "CAP, TA, 47 µF, 25 V, +/- 20%, 0.12 ohm, SMD", Cap_Case=D, Manufacturer=Kemet, Supplier Part Number 1=399-4650-1-ND, Tolerance_%=20, Value1="0.12 ohm", Value2=25V, ValueDisplayed=47µF, AEC Category=Q200, AEC Qualified=?, Cap_F=0.000047, ComponentLink1Description="Datasheet link", ComponentLink1URL=http://www.kemet.com/kemet/web/homepage/kechome.nsf/file/T495%20Series/$file/F3102_T495.pdf, CompType=Capacitor, ESR_ohm=0.12, IRMS_A=1.006, LatestRevisionDate=2015-12-04, LatestRevisionNote="Updated supplier links", MountType=SMT, PackageReference=7343-31, PartNumber=T495D476M025ATE120, Polarized=Y, Publisher="Texas Instruments", RoHS=Y, Series=T495, Supplier 1=Digi-Key, Supplier 2=Mouser, Supplier 3=Farnell, Supplier Part Number 2=80-T495D476M025E120, Supplier Part Number 3=1641490, SymbolVersion=2008-07-09, TaMax_C=125, TaMin_C=-55, Technology=TA, U/M=EA, VDC_V=25
C2 C6 C7 C8 C9 C25: "CAP, CERM, 22 µF, 25 V, +/- 10%, X5R, 1210", Cap_Case=1210, Manufacturer=MuRata, Supplier Part Number 1=81-GRM32ER61E226KE15, TempCo=X5R, Tolerance_%=10, Value1="0.002 ohm", Value2=25V, ValueDisplayed=22µF, AEC Category=Q200, AEC Qualified=?, Cap_F=0.000022, ComponentLink1Description="Datasheet link", ComponentLink1URL=http://search.murata.co.jp/Ceramy/PnsearchViewAction.do?HnOFG=ON&HnNFG=ON&SEL_CNT=50&sLang=en&sKey=GRM32ER61E226KE15L&x=9&y=9&search=startwith, CompType=Capacitor, ESR_ohm=0.002, IRMS_A=3.67, LatestRevisionDate=2017-01-30, MountType=SMT, PackageReference=1210, PartNumber=GRM32ER61E226KE15L, Polarized=N, Published=2008-06-19, Publisher="Texas Instruments", RoHS=Y, SizeArea_mm2=8, SizeAreaWB_mm2=14.7, SizeX_mm=3.2, SizeY_mm=2.5, SizeZ_mm=2.7, Supplier 1=Mouser, Supplier 2=Farnell, Supplier Part Number 2=1828821, SymbolVersion=2008-07-09, TaMax_C=85, TaMin_C=-55, Technology=Ceramic, U/M=EA, VDC_V=25
C3 C4 C17 C18 C20 C21: "CAP, CERM, 10 µF, 25 V, +/- 20%, X5R, 0603", Cap_Case=0603, Manufacturer=MuRata, Supplier Part Number 1=490-7202-1-ND, TempCo=X5R, Tolerance_%=20, Value1=Unknown, Value2=25V, ValueDisplayed=10µF, AEC Category=Q200, AEC Qualified=?, Cap_F=0.00001, ComponentLink1Description="Datasheet link", ComponentLink1URL=http://psearch.murata.com/capacitor/product/GRM188R61E106MA73%23.pdf, CompType=Capacitor, LatestRevisionDate=2016-04-09, MountType=SMT, PackageReference=0603, PartNumber=GRM188R61E106MA73D, Polarized=N, Published=2008-06-19, Publisher="Texas Instruments", RoHS=Y, Supplier 1=Digi-Key, Supplier 2=Mouser, Supplier 3=Farnell, Supplier Part Number 2=81-GRM188R61E106MA3L, Supplier Part Number 3=1828803RL, SymbolVersion=2008-07-09, TaMax_C=85, TaMin_C=-55, Technology=Ceramic, U/M=EA, VDC_V=25
C5 C22: "CAP, CERM, 1 µF, 25 V,+/- 10%, X5R, 0402", Cap_Case=0402, Manufacturer=TDK, Supplier Part Number 1=445-9066-1-ND, TempCo=X5R, Tolerance_%=10, Value2=25V, ValueDisplayed=1µF, AEC Category=Q200, AEC Grade=N/A, AEC Qualified=N, Cap_F=0.000001, ComponentLink1Description="Datasheet link", ComponentLink1URL=https://product.tdk.com/info/en/catalog/datasheets/mlcc_commercial_general_en.pdf, CompType=Capacitor, Green_EU RoHS=Passed, Green_EU RoHS-2=Passed, Green_Lifecycle=Active, Green_REACh=Passed, LatestRevisionDate=2017-06-22, MountType=SMT, PackageReference=0402, PartNumber=C1005X5R1E105K050BC, Polarized=N, Published=2008-06-19, Publisher="Texas Instruments", RoHS=Y, SizeArea_mm2=0.5, SizeAreaWB_mm2=3, SizeX_mm=1, SizeY_mm=0.5, SizeZ_mm=0.6, Supplier 1=Digi-Key, Supplier 2=Newark, Supplier 3=Mouser, Supplier Part Number 2=07W9127, Supplier Part Number 3=810-C1005X5R1E105K, SymbolVersion=2008-07-09, TaMax_C=80, TaMin_C=-55, Technology=Ceramic, U/M=EA, VDC_V=25
C10 C14 C23: "CAP, CERM, 100 pF, 50 V,+/- 5%, C0G/NP0, 0402", Cap_Case=0402, Manufacturer=MuRata, Supplier Part Number 1=81-GRM1555C1H101JA1D, TempCo=C0G/NP0, Tolerance_%=5, Value2=50V, ValueDisplayed=100pF, AEC Category=Q200, AEC Qualified=?, Cap_F=0.0000000001, ComponentLink1Description="Datasheet link", ComponentLink1URL=http://search.murata.co.jp/Ceramy/PnsearchViewAction.do?HnOFG=ON&HnNFG=ON&SEL_CNT=50&sLang=en&sKey=GRM1555C1H101JA01D&x=9&y=9&search=startwith, CompType=Capacitor, Green_EU RoHS=Passed, Green_EU RoHS-2=Incomplete, Green_Lifecycle=Active, Green_REACh=Passed, LatestRevisionDate=2017-06-22, MountType=SMT, PackageReference=0402, PartNumber=GRM1555C1H101JA01D, Polarized=N, Published=2008-06-19, Publisher="Texas Instruments", RoHS=Y, SizeArea_mm2=0.5, SizeAreaWB_mm2=3, SizeX_mm=1, SizeY_mm=0.5, SizeZ_mm=0.6, Supplier 1=Mouser, SymbolVersion=2008-07-09, TaMax_C=125, TaMin_C=-55, Technology=Ceramic, U/M=EA, VDC_V=50
C11 C12 C15 C16 C19: "CAP, CERM, 0.1 µF, 50 V,+/- 10%, X7R, AEC-Q200 Grade 1, 0402", Cap_Case=0402, Manufacturer=TDK, Supplier Part Number 1=445-6899-1-ND, TempCo=X7R, Tolerance_%=10, Value1="0.039064 ohm", Value2=50V, ValueDisplayed=0.1µF, AEC Category=Q200, AEC Grade=1, AEC Qualified=Y, Cap_F=0.0000001, ComponentLink1Description="Datasheet link", ComponentLink1URL=https://product.tdk.com/en/search/capacitor/ceramic/mlcc/info?part_no=CGA2B3X7R1H104K050BB, CompType=Capacitor, ESR_ohm=0.039064, Green_EU RoHS=Passed, Green_EU RoHS-2=Passed, Green_Lifecycle=Active, Green_REACh=Passed, IRMS_A=0.814669, LatestRevisionDate=2017-06-22, MountType=SMT, PackageReference=0402, PartNumber=CGA2B3X7R1H104K050BB, Polarized=N, Published=2008-06-19, Publisher="Texas Instruments", RoHS=Y, SizeArea_mm2=0.5, SizeAreaWB_mm2=3, SizeX_mm=1, SizeY_mm=0.5, SizeZ_mm=0.6, Supplier 1=Digi-Key, Supplier 2=Newark, Supplier 3=Mouser, Supplier Part Number 2=04X3148, Supplier Part Number 3=810-CGA2B3X7R1H104K, SymbolVersion=2008-07-09, TaMax_C=125, TaMin_C=-55, Technology=Ceramic, U/M=EA, VDC_V=50
C13: "CAP, CERM, 0.022 µF, 25 V,+/- 10%, X7R, AEC-Q200 Grade 1, 0402", Cap_Case=0402, Manufacturer=MuRata, Supplier Part Number 1=490-6044-1-ND, TempCo=X7R, Tolerance_%=10, Value2=25V, ValueDisplayed=0.022µF, AEC Category=Q200, AEC Grade=1, AEC Qualified=Y, Cap_F=0.000000022, ComponentLink1Description="Datasheet link", ComponentLink1URL=http://psearch.murata.com/capacitor/product/GCM155R71E223KA55%23.pdf, CompType=Capacitor, LatestRevisionDate=2017-06-22, MountType=SMT, PackageReference=0402, PartNumber=GCM155R71E223KA55D, Polarized=N, Published=2008-06-19, Publisher="Texas Instruments", RoHS=Y, SizeArea_mm2=0.5, SizeAreaWB_mm2=3, SizeX_mm=1, SizeY_mm=0.5, SizeZ_mm=0.6, Supplier 1=Digi-Key, Supplier 2=Newark, Supplier 3=Mouser, Supplier Part Number 2=55Y9821, Supplier Part Number 3=81-GCM155R71E223KA5D, SymbolVersion=2008-07-09, TaMax_C=125, TaMin_C=-55, Technology=Ceramic, U/M=EA, VDC_V=25
C26 C27 C31 C38 C41 C42 C43: "CAP, CERM, 1 µF, 25 V, +/- 10%, X5R, 0603", Cap_Case=0603, Manufacturer=MuRata, Supplier Part Number 1=490-3897-1-ND, TempCo=X5R, Tolerance_%=10, Value1=Unknown, Value2=25V, ValueDisplayed=1µF, AEC Category=Q200, AEC Qualified=?, Cap_F=0.000001, ComponentLink1Description="Datasheet link", ComponentLink1URL=http://search.murata.co.jp/Ceramy/PnsearchViewAction.do?HnOFG=ON&HnNFG=ON&SEL_CNT=50&sLang=en&sKey=GRM188R61E105KA12D&x=9&y=9&search=startwith, CompType=Capacitor, Green_EU RoHS=Passed, Green_EU RoHS-2=Incomplete, Green_Lifecycle=Active, Green_REACh=Passed, LatestRevisionDate=2017-04-28, MountType=SMT, PackageReference=0603, PartNumber=GRM188R61E105KA12D, Polarized=N, Published=2008-06-19, Publisher="Texas Instruments", RoHS=Y, SizeArea_mm2=1.28, SizeAreaWB_mm2=4.68, SizeX_mm=1.6, SizeY_mm=0.8, SizeZ_mm=1, Supplier 1=Digi-Key, Supplier 2=Mouser, Supplier 3=Farnell, Supplier Part Number 2=81-GRM188R61E105KA12, Supplier Part Number 3=1828802, SymbolVersion=2008-07-09, TaMax_C=85, TaMin_C=-55, Technology=Ceramic, U/M=EA, VDC_V=25
C29 C34 C35 C36 C37 C55: "CAP, CERM, 0.1 µF, 50 V, +/- 10%, X7R, 0603", Cap_Case=0603, Manufacturer=MuRata, Supplier Part Number 1=490-4779-1-ND, TempCo=X7R, Tolerance_%=10, Value1="0.02 ohm", Value2=50V, ValueDisplayed=0.1µF, Cap_F=0.0000001, ClassName="Full Flood", ComponentLink1Description="Datasheet link", ComponentLink1URL=http://psearch.murata.com/capacitor/product/GCM188R71H104KA57%23.pdf, CompType=Capacitor, ESR_ohm=0.02, IRMS_A=1.84, LatestRevisionDate=2014-12-30, MountType=SMT, PackageReference=0603, PartNumber=GCM188R71H104KA57D, Polarized=N, Published=2008-06-19, Publisher="Texas Instruments", RoHS=Y, Supplier 1=Digi-Key, Supplier 2=Mouser, Supplier Part Number 2=81-GCM188R71H104KA7D, SymbolVersion=2008-07-09, TaMax_C=125, TaMin_C=-55, Technology=Ceramic, U/M=EA, VDC_V=50
C30 C56: "CAP, CERM, 1000 pF, 50 V, +/- 5%, C0G/NP0, 0603", Cap_Case=0603, Manufacturer=MuRata, Supplier Part Number 1=490-1451-1-ND, TempCo=C0G/NP0, Tolerance_%=5, Value1=Unknown, Value2=50V, ValueDisplayed=1000pF, Cap_F=0.000000001, ClassName="Full Flood", ComponentLink1Description="Datasheet link", ComponentLink1URL=http://search.murata.co.jp/Ceramy/PnsearchViewAction.do?HnOFG=ON&HnNFG=ON&SEL_CNT=50&sLang=en&sKey=GRM1885C1H102JA01D&x=9&y=9&search=startwith, CompType=Capacitor, LatestRevisionDate=2014-12-30, MountType=SMT, PackageReference=0603, PartNumber=GRM1885C1H102JA01D, Polarized=N, Published=2008-06-19, Publisher="Texas Instruments", RoHS=Y, Supplier 1=Digi-Key, Supplier 2=Mouser, Supplier 3=Farnell, Supplier Part Number 2=81-GRM39C102J50, Supplier Part Number 3=8819920, SymbolVersion=2008-07-09, TaMax_C=125, TaMin_C=-55, Technology=Ceramic, U/M=EA, VDC_V=50
C32 C39 C44 C51: "CAP, CERM, 0.68 µF, 50 V, +/- 10%, X7R, 1206", Cap_Case=1206, Manufacturer=MuRata, Supplier Part Number 1=GRM31MR71H684KA88L-ND, TempCo=X7R, Tolerance_%=10, Value1=Unknown, Value2=50V, ValueDisplayed=0.68µF, Cap_F=0.00000068, ClassName="LC Caps", ComponentLink1Description="Datasheet link", ComponentLink1URL=http://search.murata.co.jp/Ceramy/PnsearchViewAction.do?HnOFG=ON&HnNFG=ON&SEL_CNT=50&sLang=en&sKey=GRM31MR71H684KA88L&x=9&y=9&search=startwith, CompType=Capacitor, LatestRevisionDate=2014-12-30, MountType=SMT, PackageReference=1206, PartNumber=GRM31MR71H684KA88L, Polarized=N, Published=2008-06-19, Publisher="Texas Instruments", RoHS=Y, Supplier 1=Digi-Key, Supplier 2=Mouser, Supplier Part Number 2=81-GRM31MR71H684KA8L, SymbolVersion=2008-07-09, TaMax_C=125, TaMin_C=-55, Technology=Ceramic, U/M=EA, VDC_V=50
C33 C40 C45 C52: "CAP, CERM, 0.01 µF, 50 V, +/- 10%, X7R, 0603", Cap_Case=0603, Manufacturer=MuRata, Supplier Part Number 1=490-1512-1-ND, TempCo=X7R, Tolerance_%=10, Value1=Unknown, Value2=50V, ValueDisplayed=0.01µF, Cap_F=0.00000001, ComponentLink1Description="Datasheet link", ComponentLink1URL=http://search.murata.co.jp/Ceramy/PnsearchViewAction.do?HnOFG=ON&HnNFG=ON&SEL_CNT=50&sLang=en&sKey=GRM188R71H103KA01D&x=9&y=9&search=startwith, CompType=Capacitor, LatestRevisionDate=2014-11-14, MountType=SMT, PackageReference=0603, PartNumber=GRM188R71H103KA01D, Polarized=N, Published=2008-06-19, Publisher="Texas Instruments", RoHS=Y, Supplier 1=Digi-Key, Supplier 2=Mouser, Supplier 3=Farnell, Supplier Part Number 2=81-GRM39X103K50D, Supplier Part Number 3=8819980, SymbolVersion=2008-07-09, TaMax_C=125, TaMin_C=-55, Technology=Ceramic, U/M=EA, VDC_V=50
C46: "CAP, CERM, 47 pF, 50 V, +/- 5%, C0G/NP0, 0603", Cap_Case=0603, Manufacturer=MuRata, Supplier Part Number 1=490-1419-1-ND, TempCo=C0G/NP0, Tolerance_%=5, Value1=Unknown, Value2=50V, ValueDisplayed=47pF, AEC Category=Q200, AEC Qualified=?, Cap_F=0.000000000047, ComponentLink1Description="Datasheet link", ComponentLink1URL=http://search.murata.co.jp/Ceramy/PnsearchViewAction.do?HnOFG=ON&HnNFG=ON&SEL_CNT=50&sLang=en&sKey=GRM1885C1H470JA01D&x=9&y=9&search=startwith, CompType=Capacitor, LatestRevisionDate=2016-01-20, MountType=SMT, PackageReference=0603, PartNumber=GRM1885C1H470JA01D, Polarized=N, Published=2008-06-19, Publisher="Texas Instruments", RoHS=Y, Supplier 1=Digi-Key, Supplier 2=Mouser, Supplier 3=Farnell, Supplier Part Number 2=81-GRM39C470J50, Supplier Part Number 3=8819840, SymbolVersion=2008-07-09, TaMax_C=125, TaMin_C=-55, Technology=Ceramic, U/M=EA, VDC_V=50
C47 C48 C49 C50: "CAP, CERM, 330 pF, 50 V, +/- 5%, C0G/NP0, 0603", Cap_Case=0603, Manufacturer=MuRata, Supplier Part Number 1=490-1439-1-ND, TempCo=C0G/NP0, Tolerance_%=5, Value1=Unknown, Value2=50V, ValueDisplayed=330pF, Cap_F=0.00000000033, ComponentLink1Description="Datasheet link", ComponentLink1URL=http://search.murata.co.jp/Ceramy/PnsearchViewAction.do?HnOFG=ON&HnNFG=ON&SEL_CNT=50&sLang=en&sKey=GRM1885C1H331JA01D&x=9&y=9&search=startwith, CompType=Capacitor, LatestRevisionDate=2014-12-30, MountType=SMT, PackageReference=0603, PartNumber=GRM1885C1H331JA01D, Polarized=N, Published=2008-06-19, Publisher="Texas Instruments", RoHS=Y, Supplier 1=Digi-Key, Supplier 2=Mouser, Supplier 3=Farnell, Supplier Part Number 2=81-GRM39C331J50, Supplier Part Number 3=8819890, SymbolVersion=2008-07-09, TaMax_C=125, TaMin_C=-55, Technology=Ceramic, U/M=EA, VDC_V=50
C53 C54: "CAP, AL, 220 µF, 35 V, +/- 20%, 0.09 ohm, TH", Cap_Case=10x12.5, Manufacturer=Panasonic, Supplier Part Number 1=P10297-ND, Tolerance_%=20, Value1="0.09 ohm", Value2=35V, ValueDisplayed=220µF, Cap_F=0.00022, ComponentLink1Description="Datasheet link", ComponentLink1URL=http://industrial.panasonic.com/www-data/pdf/ABA0000/ABA0000CE22.pdf, CompType=Capacitor, ESR_ohm=0.09, IRMS_A=0.755, LatestRevisionDate=2015-01-27, MountType=TH, PackageReference=10x12.5mm, PartNumber=EEU-FC1V221, Polarized=Y, Publisher="Texas Instruments", RoHS=Y, Series=FC, Supplier 1=Digi-Key, Supplier 2=Mouser, Supplier Part Number 2=667-EEU-FC1V221, SymbolVersion=2008-07-09, TaMax_C=105, TaMin_C=-55, Technology=AL, U/M=EA, VDC_V=35
D1: "Diode, Zener, 4.3 V, 225 mW, SOT-23", Manufacturer="ON Semiconductor", Power_W=0.225, Supplier Part Number 1=BZX84C4V3LT1GOSCT-ND, Value1=0.225W, AEC Category=Q101, AEC Qualified=?, ComponentLink1Description="Datasheet link", ComponentLink1URL=http://www.onsemi.com/pub_link/Collateral/BZX84C2V4LT1-D.PDF, CompType=Zener, LatestRevisionDate=2016-12-06, LatestRevisionNote="Updated Supplier Data", MountType=SMT, PackageReference=SOT-23, PartNumber=BZX84C4V3LT1G, Published=2008-10-08, Publisher="Texas Instruments", RJA_CperW=556, RoHS=Y, SizeArea_mm2=7.5, SizeAreaWB_mm2=14, SizeX_mm=2.5, SizeY_mm=3, SizeZ_mm=1.1, Supplier 1=Digi-Key, Supplier 2=Mouser, Supplier 3=Farnell, Supplier Part Number 2=863-BZX84C4V3LT1G, Supplier Part Number 3=1150381, SymbolVersion=2010-08-25, U/M=EA, Vr_V=N/A, Vz_V=4.3
D2 D3 D4: "Diode, Switching, 75 V, 0.3 A, SMD, 2-Leads, Body 1.2x0.8mm", Manufacturer="Fairchild Semiconductor", Supplier Part Number 1=1N4148WTCT-ND, Value1=0.3A, Value2=V, ComponentLink1Description="Datasheet link", ComponentLink1URL=https://www.fairchildsemi.com/datasheets/1N/1N914BWT.pdf, CompType=Diode, Io_A=0.3, LatestRevisionDate=2015-06-17, MountType=SMT, PackageReference="SMD, 2-Leads, Body 1.2x0.8mm", PartNumber=1N4148WT, Published=2008-06-26, Publisher="Texas Instruments", RoHS=Y, Supplier 1=Digi-Key, Supplier 2=Mouser, Supplier Part Number 2=512-1N4148WT, SymbolVersion=2008-12-08, TJmax_C=150, Type=Switching, U/M=EA, Vr_V=75
H1 H2 H3 H4: "Machine Screw, Round, #4-40 x 1/4, Nylon, Philips panhead", Alternate Manufacturer=-, DigiKeyPartNumber=H542-ND, Manufacturer="B&F Fastener Supply", Alternate PartNumber=-, ClassName="Mounting Holes", ComponentLink1Description="Datasheet Link", ComponentLink1URL=http://www.fasnetdirect.com/refguide/Machinepancombo.pdf, CompType=Hardware, LatestRevisionDate=2012-06-27, LatestRevisionNote="Initial Version", MountType=N/A, PackageReference=Screw, PartNumber="NY PMS 440 0025 PH", Publisher="Texas Instruments", RoHS=Y, Supplier 1=Digi-Key, Supplier Part Number 1=H542-ND, SymbolCreator=codlsc, SymbolVersion=2009-10-28, U/M=EA
H1: "Heatsink FOR TI MOD, 50x13.9mm", Manufacturer="Advanced Thermal Solutions", ComponentLink1Description="Datasheet Link", ComponentLink1URL=https://sps06.itg.ti.com/sites/KMS/crossdivteams/altium/docs/ComponentDatasheets/ATS-TI10P-521-C1-R1.pdf, CompType=Heatsink, LatestRevisionDate=2017-06-22, MountType=N/A, PackageReference="HEAT SINK, 50x13.9mm", PartNumber=ATS-TI10P-521-C1-R1, Publisher="Texas Instruments", RoHS=Y, SymbolCreator=a0799628, SymbolVersion=2013-12-05
J1 J2 J3 J4: library part CMP-0055113-1, "Terminal, Turret, TH, Double", Manufacturer=Keystone, Supplier Part Number 1=36-1502-2-ND, CNHeader=FALSE, ComponentLink1Description="Datasheet URL", ComponentLink1URL=http://www.keyelco.com/pdfs/M55p126.pdf, CompType="Turret Terminal", CT=FALSE, Green_EU RoHS="Passed with Exemption", Green_EU RoHS-2=Passed, Green_Lifecycle=Active, Green_REACh=Passed, LatestRevisionDate=26/05/2017, MountType=TH, PackageReference=Keystone1502-2, PartNumber=1502-2, Publisher="Texas Instruments", RoHS=Y, Supplier 1=Digi-Key
J5 J6 J17: "Header, 100mil, 3x1, Gold, TH", Manufacturer=Samtec, Supplier Part Number 1=SAM1029-03-ND, ClassName=Header, ComponentLink1Description="Datasheet Link", ComponentLink1URL=http://samtec.com/ftppub/pdf/TSW_TH.PDF, CompType=Header, LatestRevisionDate=2015-10-02, MountType=TH, PackageReference="3x1 Header", PartNumber=TSW-103-07-G-S, Publisher="Texas Instruments", RoHS=Y, Supplier 1=Digi-Key, SymbolCreator=a0799628, SymbolVersion=2013-03-28, U/M=EA
J7 J8 JP1 JP2 JP3: "Header, 100mil, 2x1, Gold, TH", Color=Black, Current_A=6.3, Manufacturer=Samtec, Supplier Part Number 1=SAM1029-02-ND, Voltage_V=550, Cert_CSA=Y, Cert_CULUS=N, Cert_UL=Y, Cert_VDE=N, ClassName=Header, ComponentLink1Description="Datasheet URL", ComponentLink1URL=http://samtec.com/ftppub/pdf/TSW_TH.PDF, CompType=Header, ContactFinish=Gold, Gender=Male, LatestRevisionDate=2016-12-09, MountType=TH, Orientation=Vertical, PackageReference="2x1 Header", PartNumber=TSW-102-07-G-S, PinCount=2, Pitch_mm=2.54, Publisher="Texas Instruments", RoHS=Y, Row_Count=1, Shrouded=N, Supplier 1=Digi-Key, SymbolCreator=a0412235, SymbolVersion=2013-10-31
J9: library part 971, "RCA Jack, Red, R/A, TH", Manufacturer=Keystone, Supplier Part Number 1=KEY1099-ND, ComponentLink1Description="Datasheet Link", ComponentLink1URL=http://www.keyelco.com/product-pdf.cfm?p=3125, CompType="Phono Jack", LatestRevisionDate=2014-12-03, MountType=TH, PackageReference="PC Mount Phono Jack-Red, TH", PartNumber=971, Publisher="Texas Instruments", RoHS=Y, Supplier 1=Digi-Key, Supplier 2=Mouser, Supplier Part Number 2=534-971, SymbolCreator=Altium, SymbolVersion=2014-11-24, U/M=EA
J10: library part 970, "RCA Jack, White, R/A, TH", Manufacturer=Keystone, Supplier Part Number 1=KEY1098-ND, ComponentLink1Description="Datasheet Link", ComponentLink1URL=http://www.keyelco.com/product-pdf.cfm?p=3125, CompType="Phono Jack", LatestRevisionDate=2014-12-03, MountType=TH, PackageReference="PC Mount Phono Jack-White, TH", PartNumber=970, Publisher="Texas Instruments", RoHS=Y, Supplier 1=Digi-Key, Supplier 2=Mouser, Supplier Part Number 2=534-970, SymbolCreator=Altium, SymbolVersion=2014-11-26, U/M=EA
J11 J13: library part 7006, "Binding Post, RED, TH", Manufacturer=Keystone, Shell Color=Red, Supplier Part Number 1=7006K-ND, ComponentLink1Description="Datasheet Link", ComponentLink1URL=http://www.keyelco.com/product-pdf.cfm?p=2394, CompType=Connector, LatestRevisionDate=2014-11-04, MountType=TH, PackageReference=11.4x27.2mm, PartNumber=7006, Publisher="Texas Instruments", RoHS=Y, Supplier 1=Digi-Key, Supplier 2=Mouser, Supplier 3=Farnell, Supplier Part Number 2=534-7006, Supplier Part Number 3=1711281, SymbolCreator=a0799628, SymbolVersion=2014-1-06, U/M=EA
J12 J14: library part 7007, "Binding Post, BLACK, TH", Manufacturer=Keystone, Shell Color=Black, Supplier Part Number 1=7007K-ND, ComponentLink1Description="Datasheet Link", ComponentLink1URL=http://www.keyelco.com/product-pdf.cfm?p=2394, CompType=Connector, LatestRevisionDate=2014-11-04, MountType=TH, PackageReference=11.4x27.2mm, PartNumber=7007, Publisher="Texas Instruments", RoHS=Y, Supplier 1=Digi-Key, Supplier 2=Mouser, Supplier 3=Newark, Supplier Part Number 2=534-7007, Supplier Part Number 3=96B2542, SymbolCreator=a0799628, SymbolVersion=2014-1-06, U/M=EA
J15: library part 1502-2, "Terminal, Turret, TH, Double", Manufacturer=Keystone, Supplier Part Number 1=1502-2K-ND, ComponentLink1Description="Datasheet Link", ComponentLink1URL=http://www.keyelco.com/pdfs/M55p126.pdf, CompType="Turret Terminal", LatestRevisionDate=2015-05-13, MountType=TH, PackageReference=Keystone1502-2, PartNumber=1502-2, Publisher="Texas Instruments", RoHS=Y, Supplier 1=Digi-Key, SymbolVersion=2010-10-20, U/M=EA
J16: library part PBC03SAAN, "Header, 100mil, 3x1, Gold, TH", Manufacturer="Sullins Connector Solutions", Supplier Part Number 1=S1011E-03-ND, ClassName=Header, ComponentLink1Description="Datasheet URL", ComponentLink1URL=http://www.sullinscorp.com/catalogs/77_Page78-79_HEADER_.100_2.54mm_MALE_BREAKAWAY.pdf, CompType=Header, LatestRevisionDate=2016-02-23, MountType=TH, PackageReference=PBC03SAAN, PartNumber=PBC03SAAN, Publisher="Texas Instruments", RoHS=Y, Supplier 1=Digi-Key, SymbolVersion=2008-06-30
L1: "Inductor, Shielded, Composite, 3 µH, 21 A, 0.0059 ohm, SMD", Manufacturer=Coilcraft, Value1="0.0059 ohm", Value2=21A, ValueDisplayed=3µH, AEC Category=Q200, AEC Grade=N/A, AEC Qualified=N, ComponentLink1Description="Datasheet link", ComponentLink1URL=http://www.coilcraft.com/pdfs/xal1350.pdf, CompType=Inductor, DCR_ohm=0.0059, Imax_A=21, Ind_H=3.0E-6, Irms="21A @ 40C rise", Isat="37A @ 30% inductance drop", LatestRevisionDate=2017-05-12, Material=Composite, MountType=SMT, PackageReference=13x14mm, PartNumber=XAL1350-302MEB, Published=2008-06-26, Publisher="Texas Instruments", RoHS=Y, SizeArea_mm2=182, SizeAreaWB_mm2=240, SizeX_mm=13, SizeY_mm=14, SizeZ_mm=5, SymbolVersion=2008-07-23, Technology=Shielded
L2: "Inductor, Shielded, Powdered Iron, 2.2 µH, 2.3 A, 0.082 ohm, SMD", Manufacturer="MuRata Toko", PartNumber=DFE252012F-2R2M=P2, Supplier Part Number 1=490-13055-1-ND, Value1="0.082 ohm", Value2=2.3A, ValueDisplayed=2.2µH, AEC Category=Q200, AEC Grade=N/A, AEC Qualified=N, ComponentLink1Description="Datasheet link", ComponentLink1URL=http://www.toko.co.jp/products-murata/pdf/inductors/m_dfe252012f.pdf, CompType=Inductor, DCR_ohm=0.082, Imax_A=2.3, Ind_H=2.2E-6, Irms="2.3A @ 40C rise", Isat="3.3A @ 30% inductance drop", LatestRevisionDate=2017-03-16, Material="Powdered Iron", MountType=SMT, PackageReference=2.5x1.2x2mm, Published=2008-06-26, Publisher="Texas Instruments", RoHS=Y, SizeArea_mm2=5.94, SizeAreaWB_mm2=11.84, SizeX_mm=2.7, SizeY_mm=2.2, SizeZ_mm=1.2, Supplier 1=Digi-Key, Supplier 2=Mouser, Supplier Part Number 2=81-DFE252012F-2R2MP2, SymbolVersion=2008-07-23, Technology=Shielded
L11 L12 L21 L22: "Inductor, Shielded, Ferrite, 10 µH, 4.2 A, 0.037 ohm, AEC-Q200 Grade 1, SMD", Manufacturer=Coilcraft, Value1="0.037 ohm", Value2=4.2A, ValueDisplayed=10µH, AEC Category=Q200, AEC Grade=1, AEC Qualified=Y, ComponentLink1Description="Datasheet link", ComponentLink1URL=http://www.coilcraft.com/pdfs/SRT8045.pdf, CompType=Inductor, DCR_ohm=0.037, Imax_A=4.2, Ind_H=10.0E-6, Irms="4.2A @ 20C rise", Isat="5.7A @ 10% inductance drop", LatestRevisionDate=2017-05-12, Material=Ferrite, MountType=SMT, PackageReference=8x8.4mm, PartNumber=SRT8045-103MEB, Published=2008-06-26, Publisher="Texas Instruments", RoHS=Y, SizeArea_mm2=67.2, SizeAreaWB_mm2=104, SizeX_mm=8, SizeY_mm=8.4, SizeZ_mm=4.6, SymbolVersion=2008-07-23, Technology=Shielded